# EAGLE board Simulador Sensor Hall (EAGLE 9.6.2)
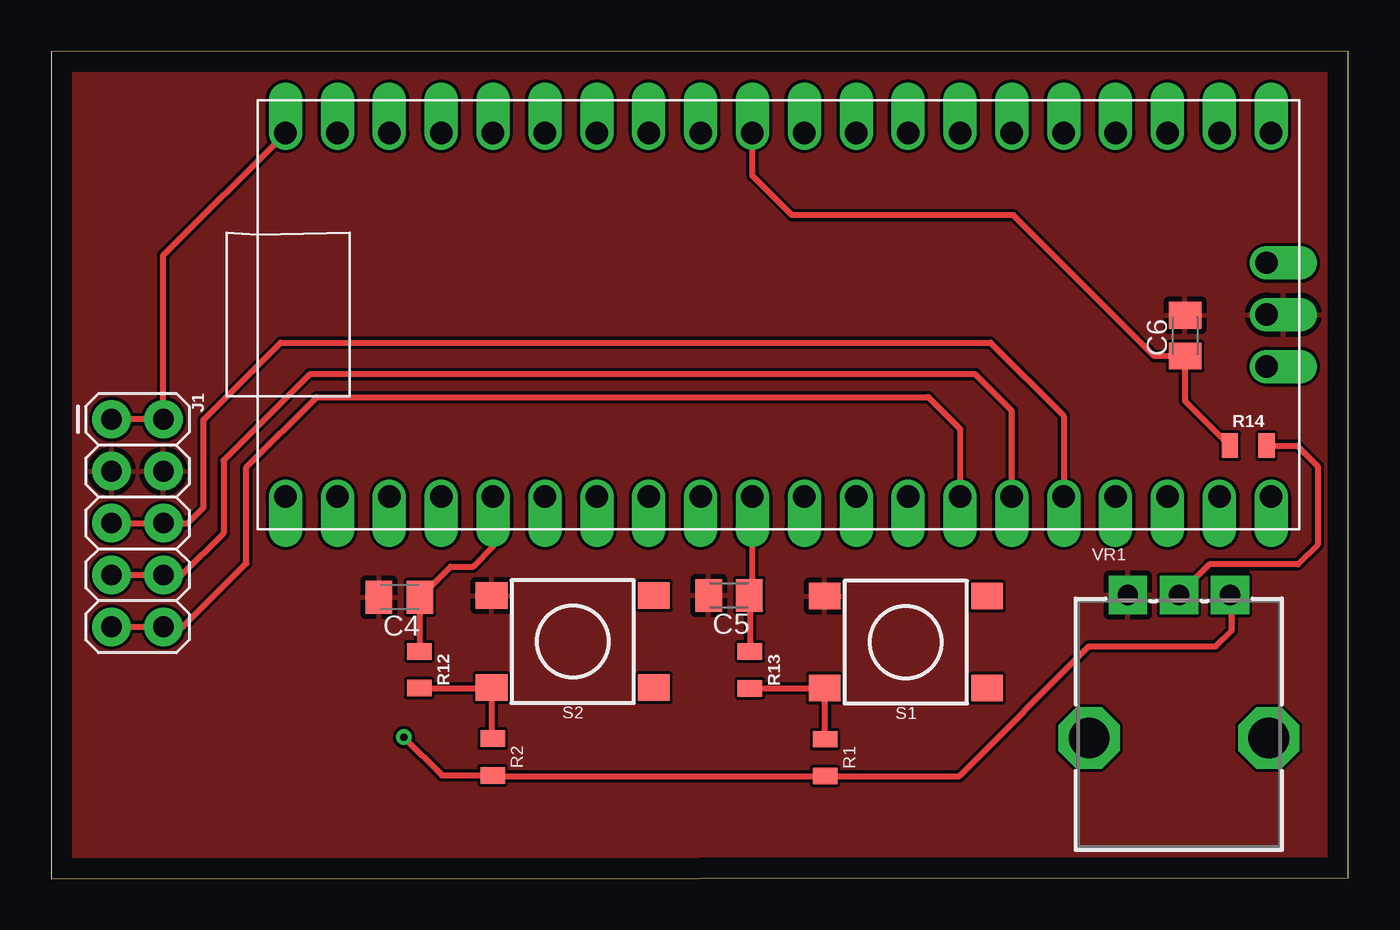
[diagram p0: board, top side]
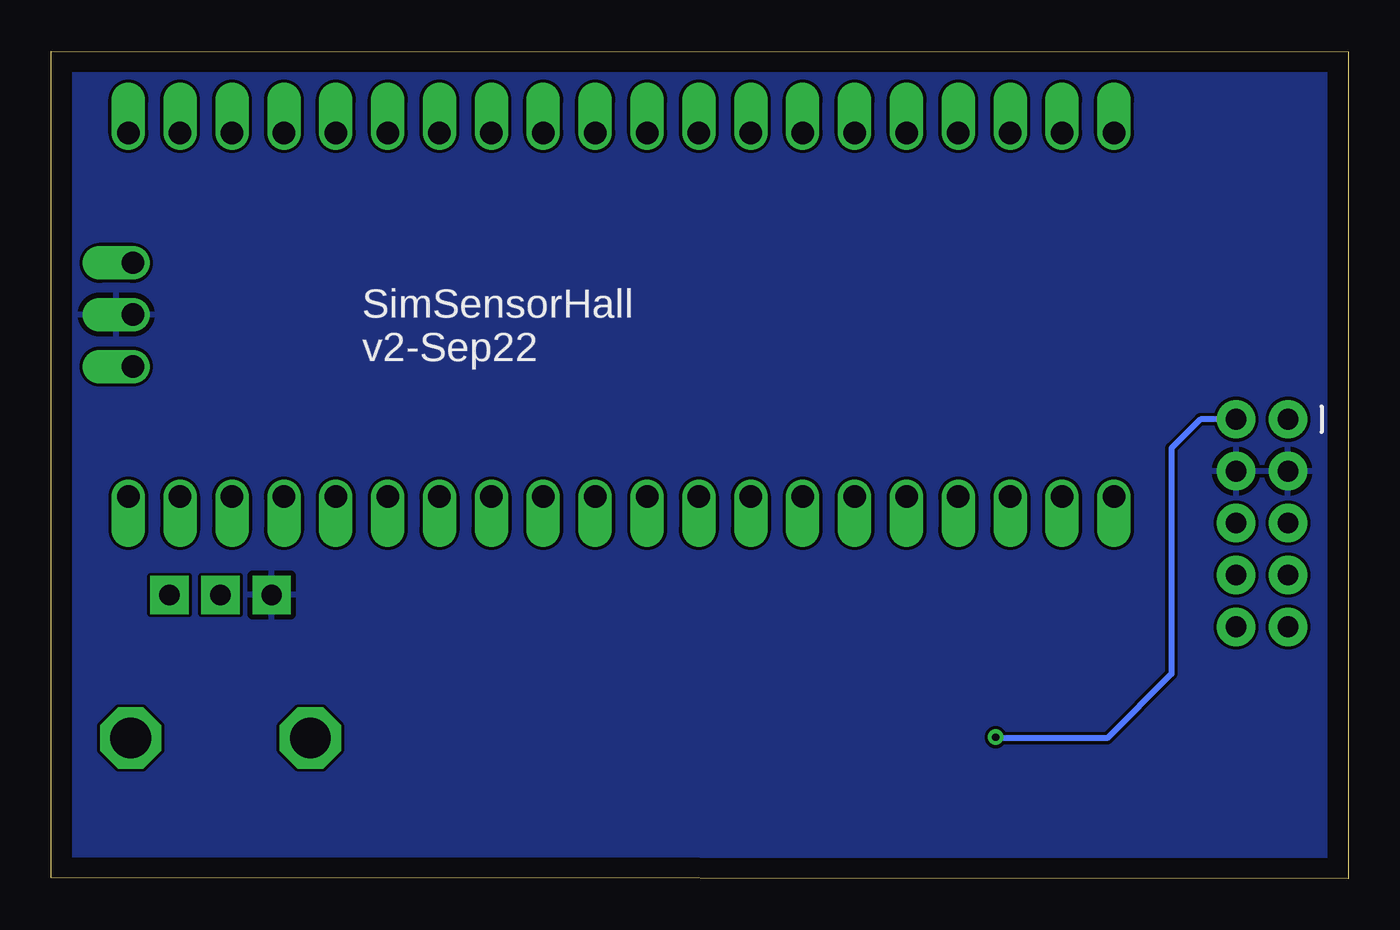
[diagram p1: board, bottom side, seen from below]

Size 63.52 x 40.51 mm. Coordinates in mm from the lower left corner, seen from the top.
Outline: 0.01,0 63.52,0.04 63.51,40.51 0,40.47 0.01,0
Copper layers (1*16): Top 0.035mm / dielectric 1.5mm / Bottom 0.035mm
Design rules "default": minimum track width 6mil, minimum drill 0.35mm, track to track 6mil, track to pad 6mil, pad to pad 6mil, via to via 6mil, smd to smd 6mil, copper to edge 40mil, drill to drill 6mil, minimum pad ring 10mil, minimum via ring 8mil, stop-mask expansion 4mil, vias tented up to drill 0mil, thermal gap 10mil

## Footprints (pad centres in the part's own frame; a part is rotated, then mirrored left to right if it is on the bottom)
C0805K = smd 1.3 x 1.6: 1 -1,0; 2 1,0
2X5 = drill 1.016 pad 1.88: 1 0,0; 2 0,2.54; 3 2.54,0; 4 2.54,2.54; 5 5.08,0; 6 5.08,2.54; 7 7.62,0; 8 7.62,2.54; 9 10.16,0; 10 10.16,2.54
0805 = smd 0.8 x 1.2: 1 -0.9,0; 2 0.9,0
TACTILE_SWITCH_SMD_6.2MM_TALL = smd 1.55 x 1.3: A1 -3.975,-2.25; A2 3.975,-2.25; B1 -3.975,2.25; B2 3.975,2.25
POT-PTH-ALPS = drill 1 pad 1.88 square: P$1 7,-2.5; P$2 7,0; P$3 7,2.5 | drill 2 octagon: P$4 0,-4.4; P$5 0,4.4
RPI_PICO_TH = drill 1.1 pad 1.6 offset: 3V3 8.89,13.97; 3V3_EN 8.89,16.51; ADC_VREF 8.89,11.43; AGND 8.89,6.35; GND@1 -8.89,19.05; GND@2 -8.89,6.35; GND@3 -8.89,-6.35; GND@4 -8.89,-19.05; GND@5 0,-23.9; GND@6 8.89,-19.05; GND@7 8.89,-6.35; GND@8 8.89,19.05; GP0 -8.89,24.13; GP1 -8.89,21.59; GP2 -8.89,16.51; GP3 -8.89,13.97; GP4 -8.89,11.43; GP5 -8.89,8.89; GP6 -8.89,3.81; GP7 -8.89,1.27; GP8 -8.89,-1.27; GP9 -8.89,-3.81; GP10 -8.89,-8.89; GP11 -8.89,-11.43; GP12 -8.89,-13.97; GP13 -8.89,-16.51; GP14 -8.89,-21.59; GP15 -8.89,-24.13; GP16 8.89,-24.13; GP17 8.89,-21.59; GP18 8.89,-16.51; GP19 8.89,-13.97; GP20 8.89,-11.43; GP21 8.89,-8.89; GP22 8.89,-3.81; GP26_A0 8.89,1.27; GP27_A1 8.89,3.81; GP28_A2 8.89,8.89; RUN 8.89,-1.27; SWCLK -2.54,-23.9; SWDIO 2.54,-23.9; VBUS 8.89,24.13; VSYS 8.89,21.59

## Placement (x,y rotation side)
C4  [C0805K]  17.06,13.78 180 top
C5  [C0805K]  33.19,13.87 180 top
C6  [C0805K]  55.52,26.58 90 top
J1  [2X5]  2.96,22.49 270 top
R1  [0805]  37.9,5.93 270 top
R2  [0805]  21.62,5.96 270 top
R12  [0805]  18.02,10.23 270 top
R13  [0805]  34.21,10.22 270 top
R14  [0805]  58.61,21.2 0 top
S1  MOMENTARY-SWITCH-SPST-SMD-6.2MM-TALL  [TACTILE_SWITCH_SMD_6.2MM_TALL]  41.85,11.58 180 top
S2  MOMENTARY-SWITCH-SPST-SMD-6.2MM-TALL  [TACTILE_SWITCH_SMD_6.2MM_TALL]  25.54,11.61 180 top
VR1  10k  [POT-PTH-ALPS]  55.22,6.89 90 top
X1  [RPI_PICO_TH]  35.61,27.61 90 top

## Library data of the parts
C4-C6 = rcl; SPICEPREFIX: C
J1 = SparkFun-Connectors; PROD_ID: CONN-08499; SF_ID: PRT-0778
R1 R2 R12-R14 = SparkFun-Resistors
S1 S2 = SparkFun-Switches; PROD_ID: SWCH-11966; SF_SKU: COM-12992
VR1 = SparkFun-Resistors; PROD_ID: RES-09177; SF_SKU: COM-09288
X1 = RaspberryPi_Pico

## Nets
DIR: C5.1 R13.1 X1.GP7
GND: C4.2 C5.2 C6.2 J1.3 J1.4 S1.A2 S2.A2 VR1.P$3 X1.GND@5
HALL_A: J1.5 J1.6 X1.GP12
HALL_B: J1.7 J1.8 X1.GP11
HALL_C: J1.9 J1.10 X1.GP10
N$4: R2.1 R12.2 S2.B2
N$6: R1.1 R13.2 S1.B2
N$8: R14.2 VR1.P$2
SPEED: C6.1 R14.1 X1.GP26_A0
START_STOP: C4.1 R12.1 X1.GP3
VCC: J1.1 J1.2 R1.2 R2.2 VR1.P$1 X1.VBUS

## Tracks (layer width: path | path; a pad name or v marks a point on that pad's centre or on a via)
DIR
  Top 0.305: R13.1 34.21,13.85 C5.1 34.31,13.99 34.31,18.69 X1.GP7
GND
  pour Top: -1.06,41.36 64.44,41.36 64.44,-1.11 -1.06,-1.23
  pour Bottom: -0.84,41.39 64.66,41.39 64.66,-1.11 -0.84,-1.11
HALL_A
  Top 0.305: J1.5 J1.6 6.69,17.41 7.47,18.19 7.47,22.47 11.24,26.24 46,26.24 49.58,22.66 X1.GP12
HALL_B
  Top 0.305: J1.7 J1.8 6.4,14.87 8.45,16.92 8.45,20.48 12.66,24.69 45.26,24.69 47.04,22.91 X1.GP11
HALL_C
  Top 0.305: J1.9 J1.10 6.45,12.33 9.56,15.44 9.56,20.13 13,23.57 42.95,23.57 44.5,22.02 X1.GP10
N$4
  Top 0.305: R12.2 21.54,9.33 S2.B2 21.57,6.92 R2.1
N$6
  Top 0.305: R13.2 S1.B2 | S1.B2 | R1.1 37.9,9.29 S1.B2
N$8
  Top 0.305: R14.2 61.01,21.2 62.01,20.2 62.01,16.35 61.05,15.39 56.72,15.39 VR1.P$2
SPEED
  Top 0.305: R14.1 55.52,23.39 C6.1 54.02,25.58 47.12,32.48 36.27,32.48 34.34,34.41 X1.GP26_A0
START_STOP
  Top 0.305: X1.GP3 21.64,16.27 20.65,15.28 19.56,15.28 C4.1 18.06,11.17 R12.1
VCC  (via drill 0.35)
  Top 0.305: X1.VBUS 5.5,30.52 J1.2 J1.1 | v17.27,6.93 19.14,5.06 R2.2 21.65,5.03 R1.2 44.47,5.03 50.81,11.37 57.02,11.37 57.8,12.15 57.8,13.81 VR1.P$1
  Bottom 0.305: J1.2 7.25,22.49 8.66,21.08 8.66,10.03 11.81,6.88 17.22,6.88 v17.27,6.93

## Text on the board
bPlace: SimSensorHall / v2-Sep22